# Altium PCB Function Generator.PcbDoc
Units mm, origin at the board's own origin, x right, y up, seen from the top; angles counter-clockwise.
Board outline 100 x 100 mm, 2 copper layers (Top Layer, Bottom Layer); 101 components, 64 nets, 319 pads, 0 vias.
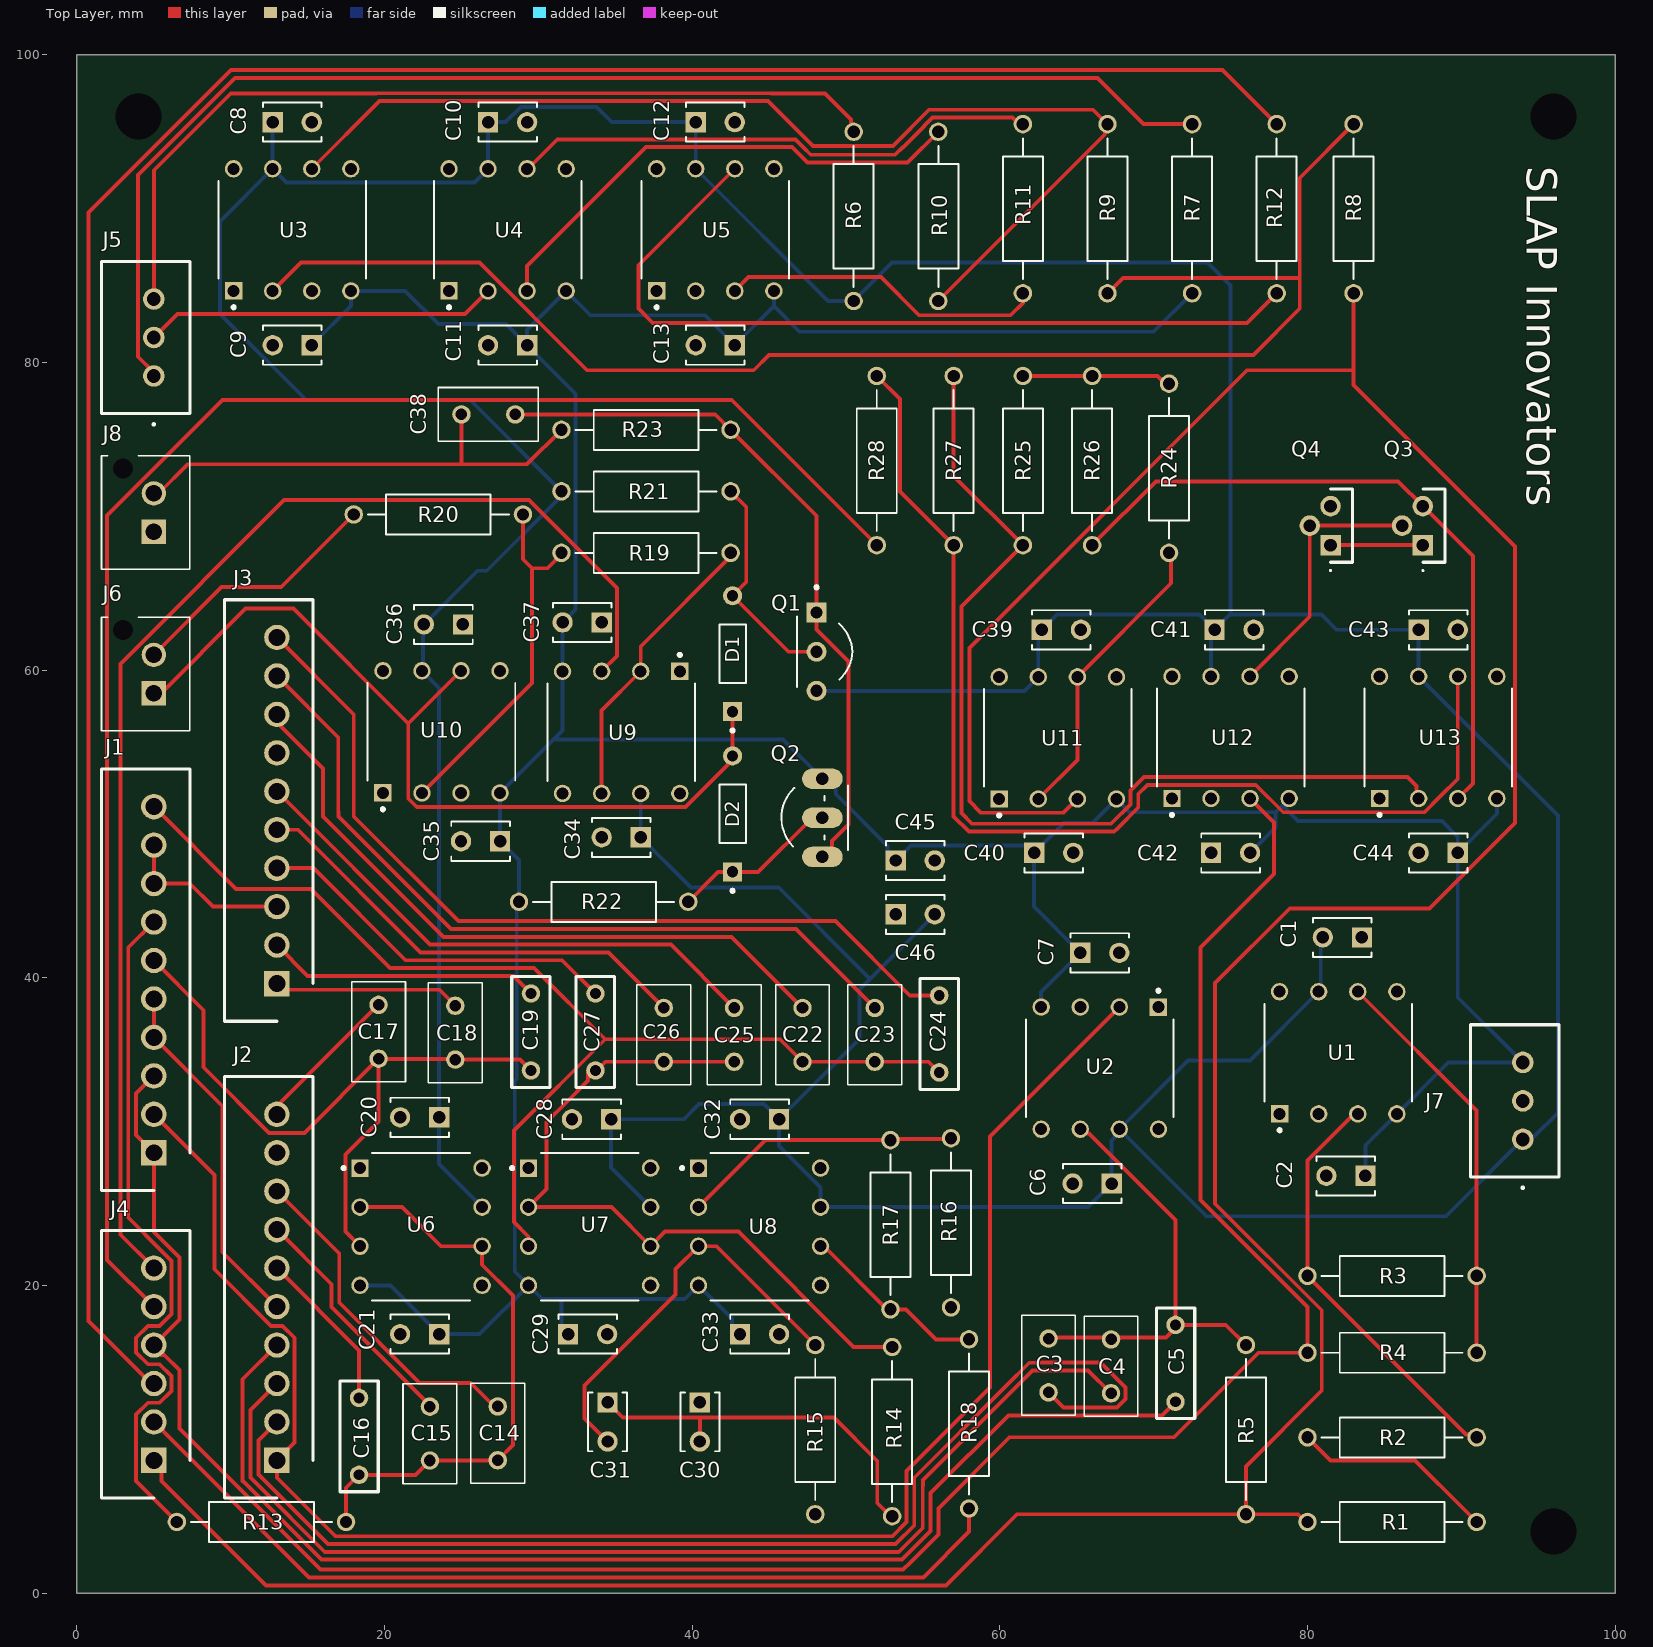
[diagram p0: Top Layer view]
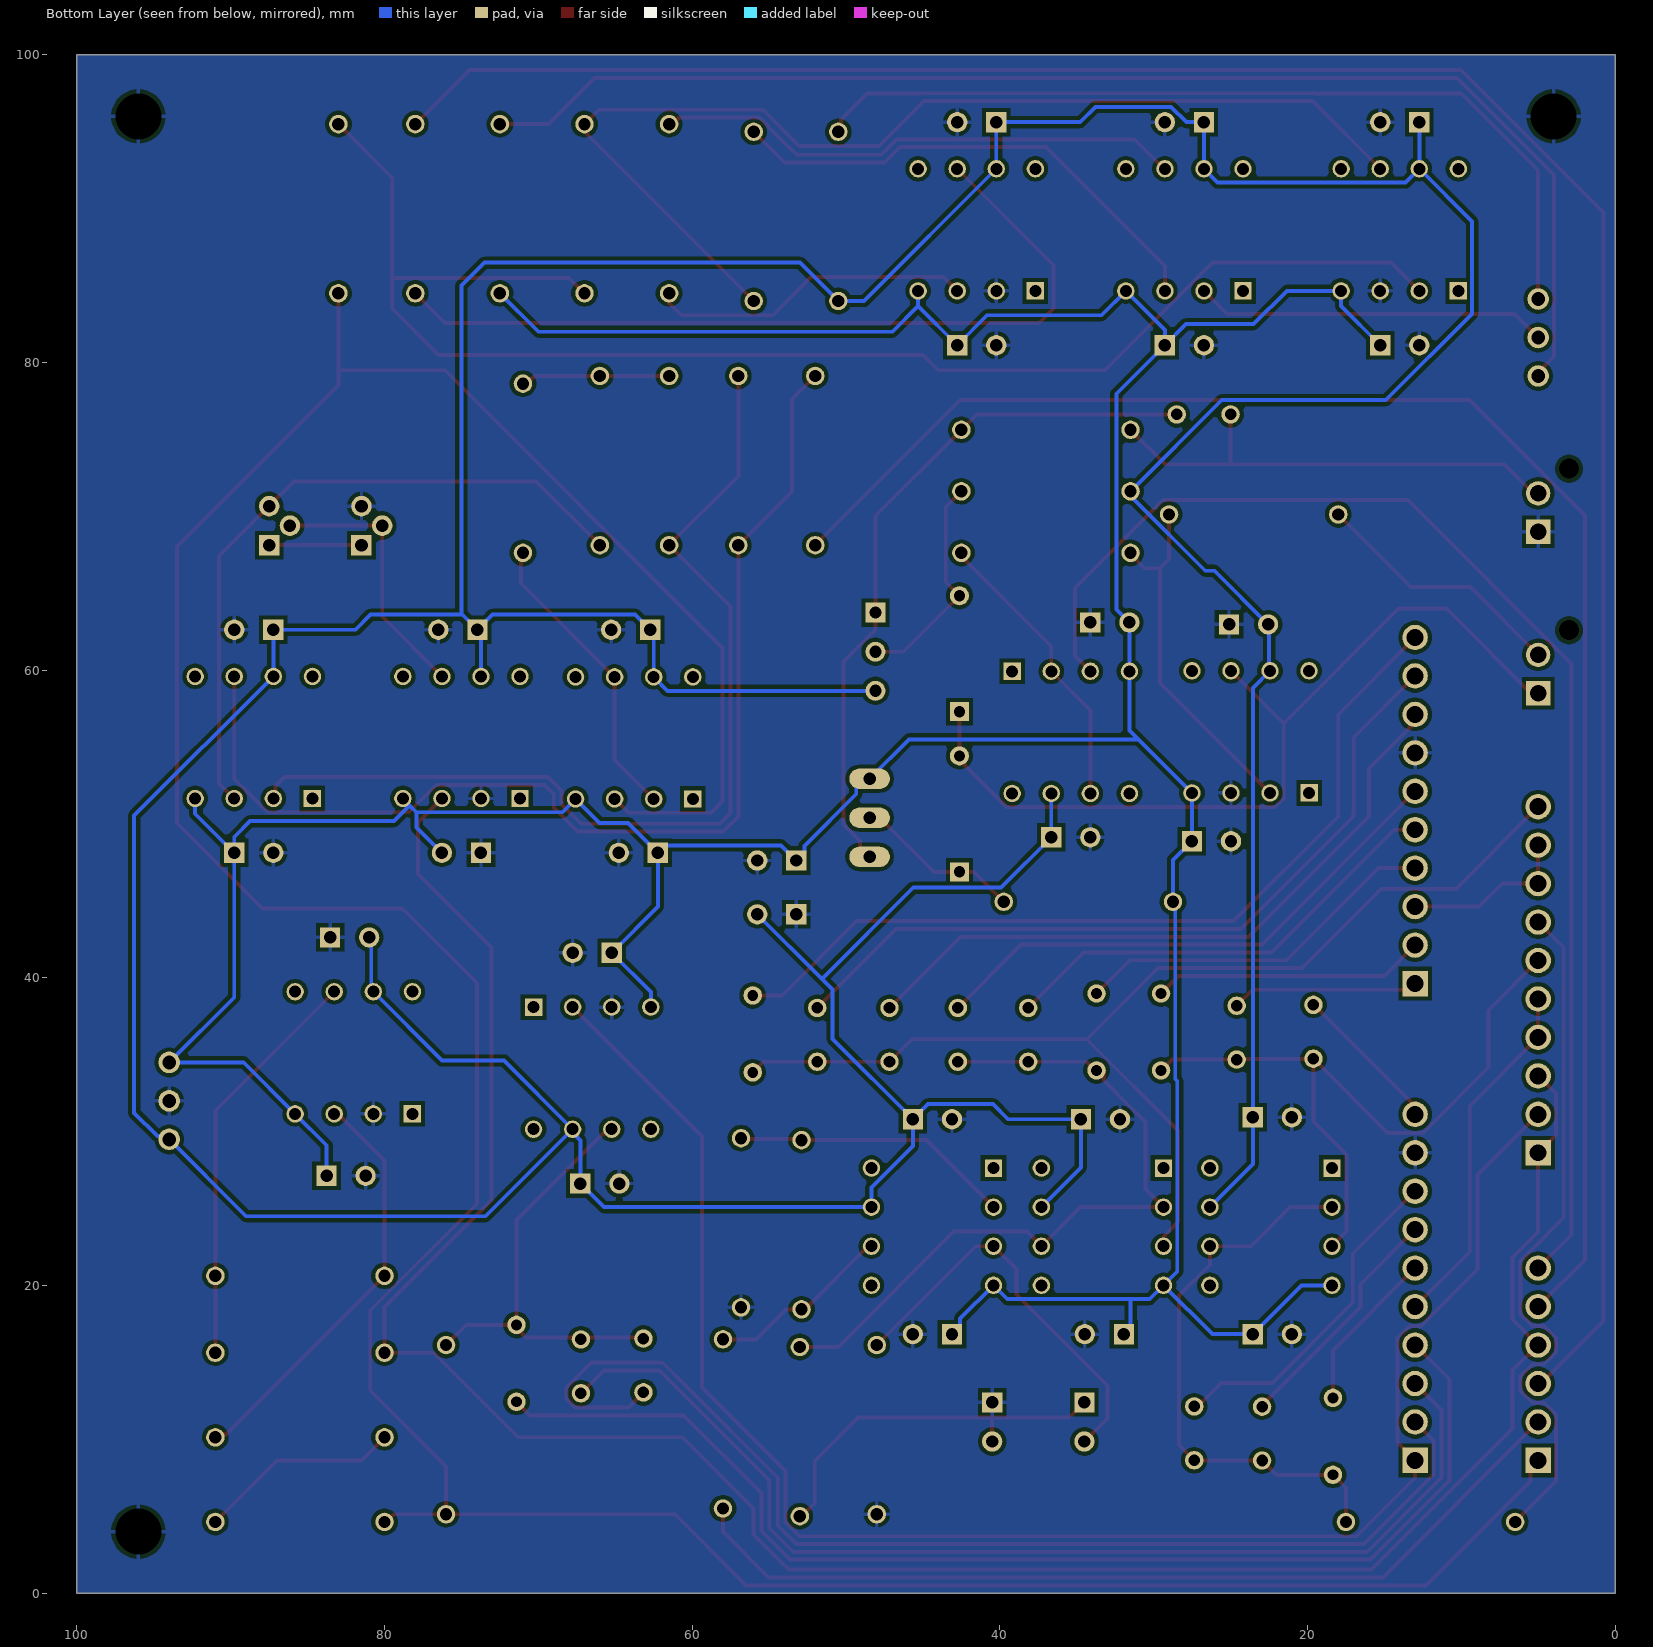
[diagram p1: Bottom Layer view, seen from below]
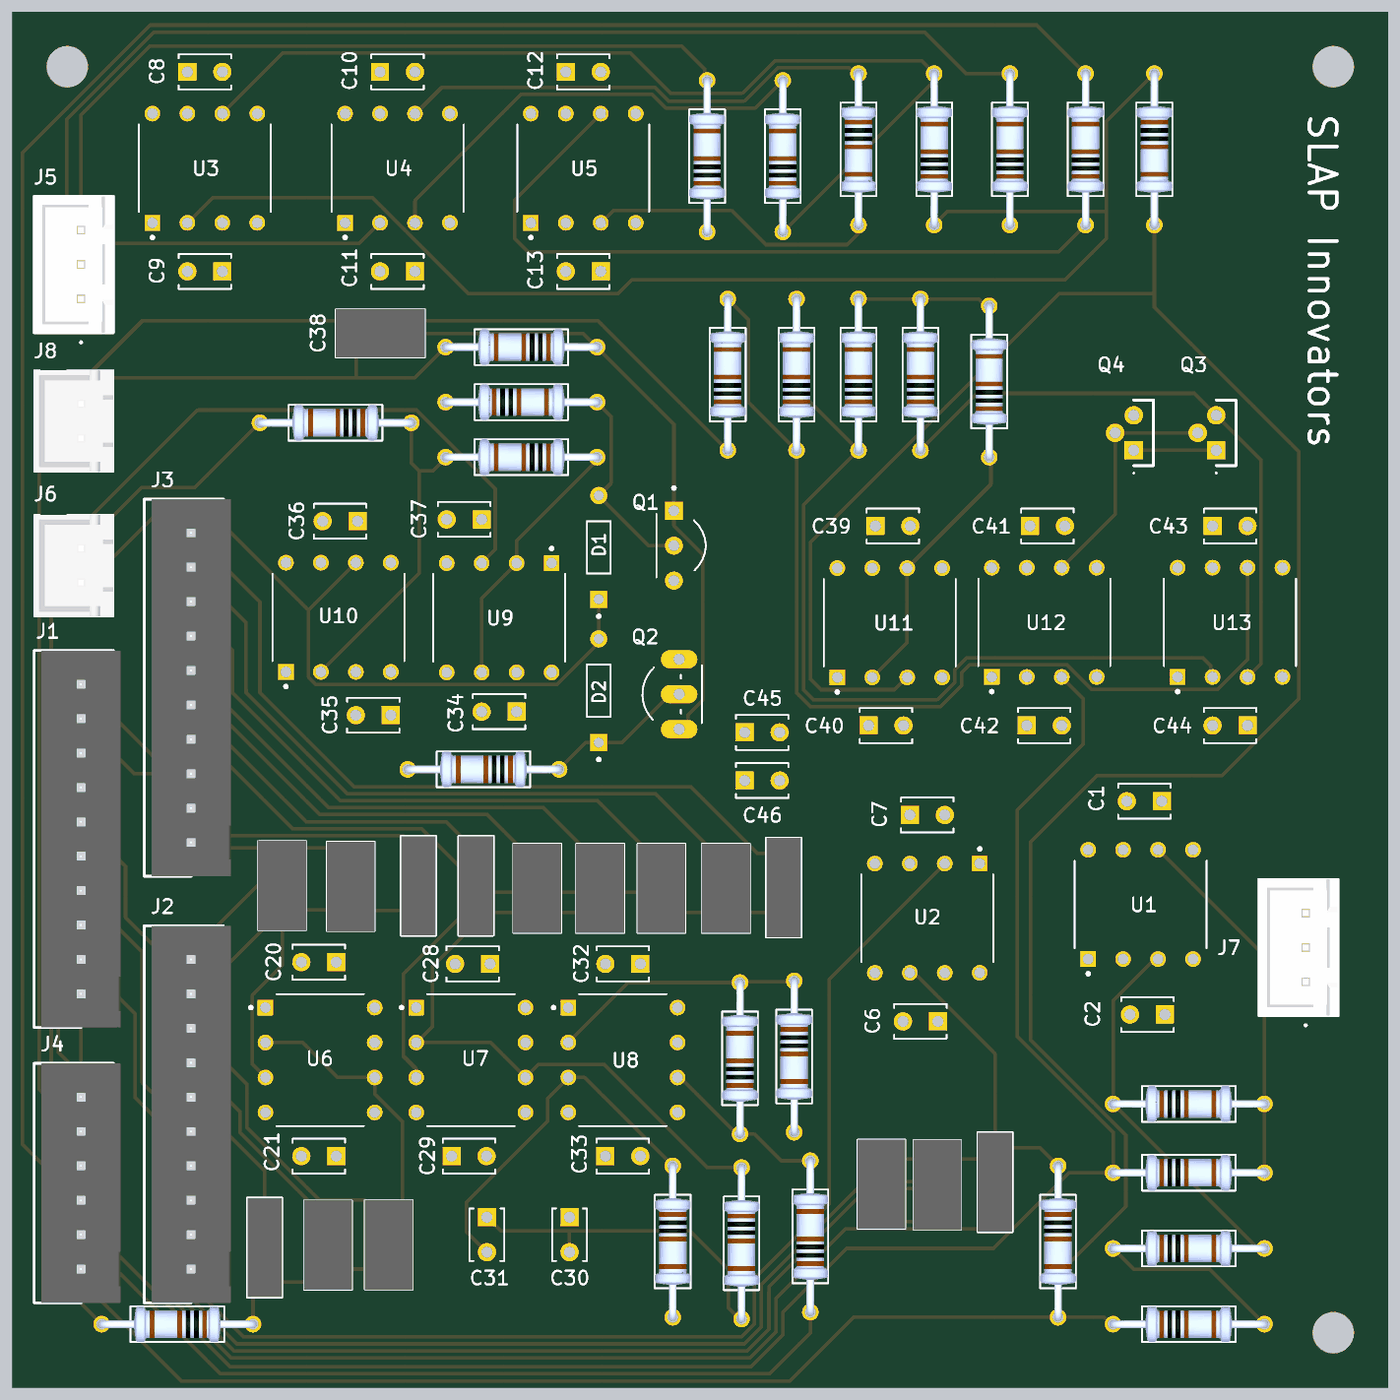
[diagram p2: 3D render of the assembled board from above, using the file's embedded part models]

## Layer stack, top to bottom
Top Solder: solder mask 0.0102, Solder Resist, Dk 3.5
Top Layer: signal copper 0.0356
Dielectric 1: dielectric 0.32, FR-4, Dk 4.8
Bottom Layer: signal copper 0.0356
Bottom Solder: solder mask 0.0102, Solder Resist, Dk 3.5

## Board outline
0,0 100,0 100,100 0,100

## Design rules (kind name [scope] priority, off if disabled: settings)
Clearance [All] p1: gap=0.254 ignorepadtopadclearanceinfootprint=FALSE except(0.2: Arc-THPad Track-THPad SMDPad-THPad THPad-THPad)
HoleSize [All] p1: absolutevalues=TRUE maxlimit=5 minlimit=0.025 maxpercent=80.000 minpercent=20.000
MinimumSolderMaskSliver [All] p1: minsoldermaskwidth=0.2
PolygonConnect [All] p1: connectstyle=Relief reliefconductorwidth=0.254 reliefentries=4 polygonreliefangle="90 Angle" airgapwidth=0.254
RoutingVias [All] p1: holewidth=0.711 width=1.27 viastyle="Through Hole" minholewidth=0.711 minwidth=1.27 maxholewidth=0.711 maxwidth=1.27
SolderMaskExpansion [All] p1: expansion=0 istentingtop=FALSE
SupplyNets "Schematic Supply Nets" [InNet('GND')] p1: voltage=0.000
Width [All] p1: maxlimit=0.254 minlimit=0.254 preferedwidth=0.254
28 further rules are at their usual default settings.

## Components (designator, comment, footprint, x,y, rotation, side; value= is the part's Value field where it differs from the comment)
C1 "0.1uF" CAPRR254W54L381T254H466 82.27,42.626 r180 top
C2 "0.1uF" CAPRR254W54L381T254H466 82.5,27.126 r180 top
C3 "10nF" 50F2D103J 63.167,13.049 r90 top
C4 "100nF" 50F2D103J 67.231,12.993 r90 top
C5 "FKS2_1.0N_100M" FKS210N100M 71.422,12.438 r90 top
C6 "0.1uF" CAPRR254W54L381T254H466 66,26.626 r180 top
C7 "0.1uF" CAPRR254W54L381T254H466 66.5,41.626 r0 top
C8 "0.1uF" CAPRR254W54L381T254H466 14,95.626 r0 top
C9 "0.1uF" CAPRR254W54L381T254H466 14,81.126 r180 top
C10 "0.1uF" CAPRR254W54L381T254H466 28,95.626 r0 top
C11 "0.1uF" CAPRR254W54L381T254H466 28,81.126 r180 top
C12 "0.1uF" CAPRR254W54L381T254H466 41.5,95.626 r0 top
C13 "0.1uF" CAPRR254W54L381T254H466 41.5,81.126 r180 top
C14 "2.2nF" 50F2D103J 27.361,8.636 r90 top
C15 "22nF" 50F2D103J 22.951,8.622 r90 top
C16 "220nF" FKS210N100M 18.344,7.691 r90 top
C17 "2.2nF" 50F2D103J 19.614,38.242 r270 top
C18 "22nF" 50F2D103J 24.602,38.186 r270 top
C19 "220nF" FKS210N100M 29.52,38.98 r270 top
C20 "0.1uF" CAPRR254W54L381T254H466 22.281,30.932 r180 top
C21 "0.1uF" CAPRR254W54L381T254H466 22.281,16.835 r180 top
C22 "2.2nF" 50F2D103J 47.173,38.044 r270 top
C23 "22nF" 50F2D103J 51.872,38.044 r270 top
C24 "220nF" FKS210N100M 56.063,38.853 r270 top
C25 "2.2nF" 50F2D103J 42.728,34.544 r90 top
C26 "22nF" 50F2D103J 38.156,34.544 r90 top
C27 "220nF" FKS210N100M 33.711,33.98 r90 top
C28 "0.1uF" CAPRR254W54L381T254H466 33.457,30.805 r180 top
C29 "0.1uF" CAPRR254W54L381T254H466 33.203,16.835 r0 top
C30 "0.1uF" CAPRR254W54L381T254H466 40.5,11.126 r270 top
C31 "0.1uF" CAPRR254W54L381T254H466 34.5,11.126 r270 top
C32 "0.1uF" CAPRR254W54L381T254H466 44.379,30.805 r180 top
C33 "0.1uF" CAPRR254W54L381T254H466 44.379,16.835 r0 top
C34 "0.1uF" CAPRR254W54L381T254H466 35.386,49.133 r180 top
C35 "0.1uF" CAPRR254W54L381T254H466 26.242,48.879 r180 top
C36 "0.1uF" CAPRR254W54L381T254H466 23.829,62.976 r180 top
C37 "0.1uF" CAPRR254W54L381T254H466 32.846,63.103 r180 top
C38 "0.1nF" 50F2D103J 28.5,76.626 r180 top
C39 "0.1uF" CAPRR254W54L381T254H466 64,62.626 r0 top
C40 "0.1uF" CAPRR254W54L381T254H466 63.5,48.126 r0 top
C41 "0.1uF" CAPRR254W54L381T254H466 75.23,62.626 r0 top
C42 "0.1uF" CAPRR254W54L381T254H466 75,48.126 r0 top
C43 "0.1uF" CAPRR254W54L381T254H466 88.5,62.626 r0 top
C44 "0.1uF" CAPRR254W54L381T254H466 88.5,48.126 r180 top
C45 "0.1uF" CAPRR254W54L381T254H466 54.5,47.626 r0 top
C46 "0.1uF" CAPRR254W54L381T254H466 54.5,44.126 r0 top
D1 "1N4148" DIOAD753W49L380D172B 42.625,61.071 r90 top
D2 "1N4148" DIOAD753W49L380D172B 42.625,50.657 r90 top
J1 "B10B-XH-A (Var R)" SHDR10W64P0X250_1X10_2740X575X700P 5,28.626 r90 top
J2 "B10B-XH-A (Cap Select 1)" SHDR10W64P0X250_1X10_2740X575X700P 13,8.626 r90 top
J3 "B10B-XH-A (Cap Select 2)" SHDR10W64P0X250_1X10_2740X575X700P 13,39.626 r90 top
J4 "B6B-XH-A (Wave Select)" SHDR6W64P0X250_1X6_1740X575X700P 5,8.626 r90 top
J5 "B3B-XH-A_LF__SN_" B3BXHALFSN 5,79.126 r90 top
J6 "B2B-XH-AM_LF__SN_" B2BXHAMLFSN 5,58.5 r90 top
J7 "Power In" B3BXHALFSN 94,29.5 r90 top
J8 "Output" B2BXHAMLFSN 5,69 r90 top
Q1 "2N2222" TO92254P470H750-3 50.416,61.198 r270 top
Q2 "2N2907" TO92-EBC-OVAL 47.197,50.403 r90 top
Q3 "2N7000" 2N7000RLRAG 87.5,68.126 r90 top
Q4 "2N7000" 2N7000RLRAG 81.5,68.126 r90 top
R1 "2K" RESAD1100W55L680D260 85.5,4.626 r0 top
R2 "2K" RESAD1100W55L680D260 85.5,10.126 r0 top
R3 "10K" RESAD1100W55L680D260 85.5,20.626 r0 top
R4 "33" RESAD1100W55L680D260 85.5,15.626 r0 top
R5 "33" RESAD1100W55L680D260 76,10.626 r270 top
R6 "TBD" RESAD1100W55L680D260 50.5,89.5 r90 top
R7 "TBD" RESAD1100W55L680D260 72.5,90 r90 top
R8 "1K" RESAD1100W55L680D260 83,90 r270 top
R9 "2.2K" RESAD1100W55L680D260 67,90 r90 top
R10 "33" RESAD1100W55L680D260 56,89.5 r90 top
R11 "33" RESAD1100W55L680D260 61.5,90 r270 top
R12 "33" RESAD1100W55L680D260 78,90 r90 top
R13 "33" RESAD1100W55L680D260 12,4.626 r180 top
R14 "50" RESAD1100W55L680D260 53,10.5 r270 top
R15 "100k" RESAD1100W55L680D260 48,10.626 r270 top
R16 "330" RESAD1100W55L680D260 56.825,24.074 r270 top
R17 "20k" RESAD1100W55L680D260 52.888,23.947 r90 top
R18 "33" RESAD1100W55L680D260 58,11 r90 top
R19 "500" RESAD1100W55L680D260 37,67.626 r180 top
R20 "33" RESAD1100W55L680D260 23.5,70.126 r180 top
R21 "1M" RESAD1100W55L680D260 37,71.626 r0 top
R22 "1M" RESAD1100W55L680D260 34.243,44.942 r180 top
R23 "33" RESAD1100W55L680D260 37,75.626 r180 top
R24 "33" RESAD1100W55L680D260 71,73.126 r90 top
R25 "2k" RESAD1100W55L680D260 61.5,73.626 r90 top
R26 "2k" RESAD1100W55L680D260 66,73.626 r90 top
R27 "2k" RESAD1100W55L680D260 57,73.626 r90 top
R28 "33" RESAD1100W55L680D260 52,73.626 r90 top
U1 "LM318N" DIP794W45P254L959H508Q8 82,35.126 r90 top
U2 "LM318N" DIP794W45P254L959H508Q8 66.5,34.126 r270 top
U3 "LM318N" DIP794W45P254L959H508Q8 14,88.626 r90 top
U4 "LM318N" DIP794W45P254L959H508Q8 28,88.626 r90 top
U5 "LM318N" DIP794W45P254L959H508Q8 41.5,88.626 r90 top
U6 "LM318N" DIP794W45P254L959H508Q8 22.375,23.82 r0 top
U7 "LM318N" DIP794W45P254L959H508Q8 33.33,23.82 r0 top
U8 "LM318N" DIP794W45P254L959H508Q8 44.379,23.82 r0 top
U9 "LM318N" DIP794W45P254L959H508Q8 35.386,55.958 r270 top
U10 "LM318N" DIP794W45P254L959H508Q8 23.702,55.991 r90 top
U11 "LM318N" DIP794W45P254L959H508Q8 63.77,55.596 r90 top
U12 "LM318N" DIP794W45P254L959H508Q8 75,55.626 r90 top
U13 "LM318N" DIP794W45P254L959H508Q8 88.5,55.626 r90 top

## Footprints (in the part's own frame and the unit in brackets; to place one, negate y for a bottom-side part, rotate by r counter-clockwise, add the part's x,y. Pads: shape width x height; smd on the part's side, far side on the other; paste and mask are expansions set on the pad)
2N7000RLRAG [mm]
  rect 1.333x1.333 hole 0.82: 1(0,0)
  round 1.333 hole 0.82: 2(1.27,1.35) 3(2.54,0)
  silkscreen extent -1.7,-1.43 3.65,0.05
50F2D103J [mm]
  round 1.2 hole 0.75: 1(0,0) 2(3.5,0)
  silkscreen extent -1.5,-1.75 5,1.75, body extent -1.5,-1.75 5,1.75, height 8.6
B2BXHAMLFSN [mm]
  rect 1.575x1.575 hole 1.05: 1(0,0)
  round 1.575 hole 1.05: 2(2.5,0)
  round 0.65 hole 1.3 unplated: MH1(4.1,2)
  silkscreen extent -2.45,-2.35 4.95,3.4, body extent -2.45,-2.36 4.95,3.39, height 6.9
B3BXHALFSN [mm]
  round 1.4 hole 0.9: 1(0,0) 2(2.5,0) 3(5,0)
  silkscreen extent -3.2,-2.35 7.45,3.4, body extent -2.45,-2.35 7.45,3.4, height 7.09
CAPRR254W54L381T254H466 [mm]
  rect 1.318x1.318 / inner round 1.318 / far side rect 1.318x1.318 hole 0.81: 1(-1.27,0)
  round 1.318 hole 0.81: 2(1.27,0)
  silkscreen extent -1.91,-1.27 1.91,1.27
DIOAD753W49L380D172B [mm]
  round 1.238 hole 0.73: A(3.768,0)
  rect 1.238x1.238 / inner round 1.238 / far side rect 1.238x1.238 hole 0.73: K(-3.768,0)
  silkscreen extent -5.1,-0.86 1.9,0.86
DIP794W45P254L959H508Q8 [mm]
  rect 1.13x1.13 hole 0.78: 1(-3.97,3.81)
  round 1.13 hole 0.78: 2(-3.97,1.27) 3(-3.97,-1.27) 4(-3.97,-3.81) 5(3.97,-3.81) 6(3.97,-1.27) 7(3.97,1.27) 8(3.97,3.81)
  silkscreen extent -5.13,-4.79 3.18,4.79
FKS210N100M [mm]
  round 1.2 hole 0.7: 1(0,0) 2(5,0)
  silkscreen extent -1.1,-1.25 6.1,1.25, body extent -1.1,-1.25 6.1,1.25, height 6.6
RESAD1100W55L680D260 [mm]
  round 1.2 hole 0.8: 1(-5.5,0) 2(5.5,0)
  silkscreen extent -4.58,-1.3 4.58,1.3, body extent -5.77,-1.3 5.77,1.3, height 2.6
SHDR6W64P0X250_1X6_1740X575X700P [mm]
  rect 1.65x1.65 hole 1.1: 1(0,0)
  round 1.65 hole 1.1: 2(2.5,0) 3(5,0) 4(7.5,0) 5(10,0) 6(12.5,0)
  silkscreen extent -2.45,-2.35 14.95,3.4, body extent -2.45,-2.88 14.95,2.88, height 7
SHDR10W64P0X250_1X10_2740X575X700P [mm]
  rect 1.65x1.65 hole 1.1: 1(0,0)
  round 1.65 hole 1.1: 2(2.5,0) 3(5,0) 4(7.5,0) 5(10,0) 6(12.5,0) 7(15,0) 8(17.5,0) 9(20,0) 10(22.5,0)
  silkscreen extent -2.45,-2.35 24.95,3.4, body extent -2.45,-2.88 24.95,2.88, height 7
TO92-EBC-OVAL [mil]
  oval 52x104 hole 32: B(0,-50) C(100,-50) E(-100,-50)
  silkscreen extent -82,-115 82,55
TO92254P470H750-3 [mm]
  rect 1.298x1.298 / inner round 1.298 / far side rect 1.298x1.298 hole 0.79: 1(-2.54,-2.33)
  round 1.298 hole 0.79: 2(0,-2.33) 3(2.54,-2.33)
  silkscreen extent -4.29,-3.6 2.3,0

## Part data
C1 C2 C6 C7 C8 C9 C10 C11 C12 C13 C20 C21 C28 C29 C30 C31 C32 C33 C34 C35 C36 C37 C39 C40 C41 C42 C43 C44 C45 C46: library part C315C104M5U5TA, Package=None, Availability=Unavailable, MF="{'manufacturer': u'KEMET'}", MP=C315C104M5U5TA, Price=None
C3 C4 C14 C15 C17 C18 C22 C23 C25 C26 C38: library part 50F2D103J, "Capacitor", Manufacturer_Name=Rubycon, Height=8.5mm, Manufacturer_Part_Number=50F2D103J
C5: "Capacitor", Manufacturer_Name=WIMA, Manufacturer_Part_Number="FKS2 1.0N 100M", Datasheet Link=https://www.wima.de/wp-content/uploads/media/e_WIMA_FKS_2.pdf, Height=6.5mm
C16 C19 C24 C27: library part FKS2_1.0N_100M, "Capacitor", Manufacturer_Name=WIMA, Manufacturer_Part_Number="FKS2 1.0N 100M", Datasheet Link=https://www.wima.de/wp-content/uploads/media/e_WIMA_FKS_2.pdf, Height=6.5mm
D1 D2: Package=None, Availability=Unavailable, MP=1N4148, Price=None
J1 J2 J3: library part B10B-XH-A, "Connector", Manufacturer_Name="JST (JAPAN SOLDERLESS TERMINALS)", Datasheet Link=http://www.jst-mfg.com/product/pdf/eng/eXH.pdf, Height=7mm, Manufacturer_Part_Number=B10B-XH-A
J4: library part B6B-XH-A_LF__SN_, "Connector", Arrow Part Number=B6B-XH-A(LF)(SN), Manufacturer_Name="JST (JAPAN SOLDERLESS TERMINALS)", Mouser Part Number=306-B6BXHALFSN, Arrow Price/Stock=https://www.arrow.com/en/products/b6b-xh-a-lf-sn/jst-manufacturing?region=europe, Datasheet Link=https://datasheet.lcsc.com/szlcsc/JST-Sales-America-B6B-XH-A-LF-SN_C144397.pdf, Height=7mm, Manufacturer_Part_Number=B6B-XH-A(LF)(SN), Mouser Price/Stock=https://www.mouser.co.uk/ProductDetail/JST-Commercial/B6B-XH-ALFSN?qs=cdbOS8ANM9AKmMmofXbwlw%3D%3D
J5: "Connector", Arrow Part Number=B3B-XH-A(LF)(SN), Manufacturer_Name="JST (JAPAN SOLDERLESS TERMINALS)", Mouser Part Number=306-B3BXHALFSNP, Arrow Price/Stock=https://www.arrow.com/en/products/b3b-xh-a-lf-sn/jst-manufacturing?region=europe, Datasheet Link=https://datasheet.lcsc.com/szlcsc/1812131720_JST-Sales-America-B3B-XH-A-LF-SN_C144394.pdf, Height=7mm, Manufacturer_Part_Number=B3B-XH-A(LF)(SN), Mouser Price/Stock=https://www.mouser.co.uk/ProductDetail/JST-Commercial/B3B-XH-ALFSN?qs=cdbOS8ANM9BVkoboCCIEMQ%3D%3D
J6: "Connector", Arrow Part Number=B2B-XH-AM(LF)(SN), Manufacturer_Name="JST (JAPAN SOLDERLESS TERMINALS)", Mouser Part Number=306-B2B-XH-AMLFSNP, Arrow Price/Stock=https://www.arrow.com/en/products/b2b-xh-am-lf-sn/jst-manufacturing?region=europe, Datasheet Link=https://www.jst-mfg.com/product/pdf/eng/eXH.pdf, Height=7mm, Manufacturer_Part_Number=B2B-XH-AM(LF)(SN), Mouser Price/Stock=https://www.mouser.co.uk/ProductDetail/JST-Commercial/B2B-XH-AMLFSN?qs=cdbOS8ANM9BJgHgwB7WxQw%3D%3D
J7: library part B3B-XH-A_LF__SN_, "Connector", Arrow Part Number=B3B-XH-A(LF)(SN), Manufacturer_Name="JST (JAPAN SOLDERLESS TERMINALS)", Mouser Part Number=306-B3BXHALFSNP, Arrow Price/Stock=https://www.arrow.com/en/products/b3b-xh-a-lf-sn/jst-manufacturing?region=europe, Datasheet Link=https://datasheet.lcsc.com/szlcsc/1812131720_JST-Sales-America-B3B-XH-A-LF-SN_C144394.pdf, Height=7mm, Manufacturer_Part_Number=B3B-XH-A(LF)(SN), Mouser Price/Stock=https://www.mouser.co.uk/ProductDetail/JST-Commercial/B3B-XH-ALFSN?qs=cdbOS8ANM9BVkoboCCIEMQ%3D%3D
J8: library part B2B-XH-AM_LF__SN_, "Connector", Arrow Part Number=B2B-XH-AM(LF)(SN), Manufacturer_Name="JST (JAPAN SOLDERLESS TERMINALS)", Mouser Part Number=306-B2B-XH-AMLFSNP, Arrow Price/Stock=https://www.arrow.com/en/products/b2b-xh-am-lf-sn/jst-manufacturing?region=europe, Datasheet Link=https://www.jst-mfg.com/product/pdf/eng/eXH.pdf, Height=7mm, Manufacturer_Part_Number=B2B-XH-AM(LF)(SN), Mouser Price/Stock=https://www.mouser.co.uk/ProductDetail/JST-Commercial/B2B-XH-AMLFSN?qs=cdbOS8ANM9BJgHgwB7WxQw%3D%3D
Q1: library part 2N2222A, "Bipolar (BJT) Transistor NPN 40 V 600 mA 250MHz 625 mW Through Hole TO-92", Package="TO-92-3 Diotec", Availability="In Stock", Check_prices=https://www.snapeda.com/parts/2N2222A/Diotec/view-part/?ref=eda, MF="Diotec Semiconductor", MP=2N2222A, Price=None, Purchase-URL=https://pricing.snapeda.com/search/part/2N2222A/?ref=eda, SnapEDA_Link=https://www.snapeda.com/parts/2N2222A/Diotec/view-part/?ref=snap
Q2: library part 2N2907*, "Bipolar _BJT_ Transistor PNP 40V 600mA 200MHz 1.8W Through Hole TO-18", Package="TO-18 STMicroelectronics", Availability=Unavailable, MF="ON Semiconductor", MP=2N2907, Price=None, SnapEDA_Link=https://www.snapeda.com/parts/2N2907/ON%20Semiconductor/view-part/13809/?ref=snap
Q3 Q4: library part 2N7000RLRAG, "MOSFET (N-Channel)", Manufacturer_Name=onsemi, Mouser Part Number=863-2N7000RLRAG, Arrow Part Number=2N7000RLRAG, Arrow Price/Stock=https://www.arrow.com/en/products/2n7000rlrag/on-semiconductor, Datasheet Link=https://www.onsemi.com/download/data-sheet/pdf/NDS7002A-D.PDF, Height=5.33mm, Manufacturer_Part_Number=2N7000RLRAG, Mouser Price/Stock=https://www.mouser.co.uk/ProductDetail/ON-Semiconductor/2N7000RLRAG/?qs=vLkC5FC1VN%252BydlHaU%252BKS%252Bw%3D%3D
R1 R2 R3 R4 R5 R6 R7 R8 R9 R10 R11 R12 R13 R14 R15 R16 R17 R18 R19 R20 R21 R22 R23 R24 R25 R26 R27 R28: library part MFR-25FBF52-1K, "1.07 kOhms Â±1% 0.25W, 1/4W Through Hole Resistor Axial - Metal Film", Package="Axial Yageo", Availability="In Stock", Check_prices=https://www.snapeda.com/parts/MFR-25FBF52-1K/Yageo/view-part/?ref=eda, MF=Yageo, MP=MFR-25FBF52-1K, Price=None, Purchase-URL=https://pricing.snapeda.com/search/part/MFR-25FBF52-1K/?ref=eda, SnapEDA_Link=https://www.snapeda.com/parts/MFR-25FBF52-1K/Yageo/view-part/?ref=snap
U1 U2 U3 U4 U5 U6 U7 U8 U9 U10 U11 U12 U13: "Single 40V, 15MHz, high slew rate operational amplifier 8-PDIP 0 to 70", Package="PDIP-8 Texas Instruments", Availability=Good, DigiKey-Purchase-URL=https://snapeda.com/shop?store=DigiKey&id=137601, MF="Texas Instruments", Mouser-Purchase-URL=https://snapeda.com/shop?store=Mouser&id=137601, MP=LM318N/NOPB, Price=None, SnapEDA_Link=https://www.snapeda.com/parts/LM318N/NOPB/Texas%20Instruments/view-part/137601/?ref=snap

## Free pads (board coordinates)
  round 0 hole 3: 2(4,96) 2(96,4) 2(96,96)

## Nets (pads, with @x,y where several pads share a name; then routed paths per layer and width w, separated by ;. In a path a pad name is that pad's centre, name@x,y a point inside that pad or via, vN(x,y) a via of type N, cw(c..) or ccw(c..) an arc to the next point about the centre after c; other vN are vias at no path point)
"Amp In": J4.6 U9.3 | length 85
  Top Layer w0.254: J4.6 2.832,23.294 2.832,60.408 13.477,71.053 29.384,71.053 35.102,65.335 35.102,60.914 U9.3
GND: C1.1 C2.2 C6.2 C7.2 C8.2 C9.2 C10.2 C11.2 C12.2 C13.2 C20.2 C21.2 C28.2 C29.2 C30.1 C32.2 C33.2 C34.2 C35.2 C36.1 C37.1 C39.2 C40.2 C41.2 C42.1 C43.2 C44.2 C45.2 C46.1 J2.9 J3.7 J7.2 J8.1 pad.2 Q4.3 R15.2 R16.2 U1.2 U2.3 U3.3 U5.2 U10.3 U12.2
J1_2: J1.2 J2.1 U2.2 | length 110.4
  Top Layer w0.254: J1.2 8.944,27.182 8.944,21.053 12.621,17.376 13.379,17.376 14.152,16.604 14.152,9.778 J2.1 13,7.5 16.801,3.699 53.01,3.699 53.927,4.616 53.927,7.927 59.367,13.367 59.367,29.694 U2.2
J1_4: J1.4 J1.5 J2.5 | length 23.3
  Top Layer w0.254: J1.5 J1.4 9.452,31.674 9.452,22.174 J2.5
J1_6: C17.2 C18.2 C19.2 J1.6 U6.3 | length 47.1
  Top Layer w0.254: J1.6 8.237,37.889 8.237,34.184 12.5,29.92 14.792,29.92 C17.2 ; U6.3 17.459,23.496 17.459,28.515 19.614,30.67 C17.2 ; C19.2 28.814,34.686 C18.2 24.574,34.714 19.642,34.714 C17.2
J1_7: J1.7 R13.2 | length 46.1
  Top Layer w0.254: J1.7 3.34,41.966 3.34,24.415 5.477,22.278 6.152,21.604 6.152,18.149 5.379,17.376 4.621,17.376 3.848,16.604 3.848,15.649 4.621,14.876 5.379,14.876 6.152,14.104 6.152,13.149 5.379,12.376 4.621,12.376 3.848,11.604 3.848,7.278 R13.2
J1_8: J1.8 J1.9 J3.3 | length 11.1
  Top Layer w0.254: J1.9 J1.8 7.34,46.126 8.84,44.626 J3.3
J1_10: C22.2 C23.2 C24.2 J1.10 U7.3 | length 74.5
  Top Layer w0.254: J1.10 10.348,45.778 15.222,45.778 20.366,40.634 29.724,40.634 34.351,36.007 ; U7.3 29.36,23.17 28.414,24.116 28.414,30.071 34.351,36.007 ; C24.2 56.058,33.853 55.367,34.544 C23.2 C22.2 45.71,36.007 34.351,36.007
J2_2: C3.1 J2.2 | length 75.9
  Top Layer w0.254: J2.2 11.794,9.92 11.794,7.72 16.323,3.191 16.906,3.191 18.094,3.191 53.221,3.191 54.435,4.406 54.435,5.594 54.435,7.498 60.391,13.454 61.911,14.974 62.344,14.974 62.362,14.992 63.972,14.992 66.543,14.992 67.29,14.245 68.158,13.377 68.158,12.609 67.615,12.066 64.15,12.066 C3.1
J2_3: C4.1 J2.3 | length 72.1
  Top Layer w0.254: J2.3 11.286,11.912 11.286,8.151 11.286,7.509 11.34,7.455 11.763,7.032 16.112,2.683 16.695,2.683 18.305,2.683 53.431,2.683 54.992,4.244 54.992,6.992 55,7 55,7.345 62.122,14.466 62.555,14.466 62.573,14.484 65.74,14.484 C4.1
J2_4: C5.1 J2.4 | length 78.2
  Top Layer w0.254: J2.4 10.778,13.904 10.778,7.94 10.778,7.299 10.832,7.245 15.902,2.175 16.485,2.175 18.515,2.175 53.642,2.175 55.5,4.034 55.5,6.5 60.558,11.558 70.542,11.558 C5.1
J2_6: C16.2 J2.6 | length 10.6
  Top Layer w0.254: J2.6 18.344,15.782 C16.2
J2_7: C15.2 J2.7 | length 15.6
  Top Layer w0.254: J2.7 16.548,20.079 16.548,18.588 22.951,12.185 C15.2
J2_8: C14.2 J2.8 | length 22
  Top Layer w0.254: J2.8 17.056,22.071 17.056,18.886 22.281,13.66 25.607,13.66 27.131,12.136 C14.2
J2_10: C17.1 J2.10 | length 9.9
  Top Layer w0.254: J2.10 13.267,31.393 13.267,31.93 19.579,38.242 C17.1
J3_1: C18.1 J3.1 | length 12.2
  Top Layer w0.254: J3.1 13.403,39.223 23.565,39.223 C18.1
J3_2: C19.1 J3.2 | length 17.8
  Top Layer w0.254: J3.2 15,40.126 28.374,40.126 C19.1
J3_4: C27.2 J3.4 | length 24.1
  Top Layer w0.254: J3.4 15.374,47.126 21.358,41.142 31.549,41.142 C27.2
J3_5: C26.2 J3.5 | length 30
  Top Layer w0.254: J3.5 14.374,49.626 22.35,41.65 34.55,41.65 C26.2
J3_6: C25.2 J3.6 | length 35.6
  Top Layer w0.254: J3.6 22.968,42.158 38.614,42.158 C25.2
J3_8: C22.1 J3.8 | length 44.2
  Top Layer w0.254: J3.8 13.267,56.859 13.267,56.335 16,53.602 16,50.5 23.834,42.666 26.936,42.666 30.095,42.666 30.565,42.666 32.18,42.666 34.971,42.666 42.551,42.666 C22.1
J3_9: C23.1 J3.9 | length 50.8
  Top Layer w0.254: J3.9 16.992,55.634 16.992,50.79 17,50.782 17,50.5 24.326,43.174 39.035,43.174 46.742,43.174 C23.1
J3_10: C24.1 J3.10 | length 56.6
  Top Layer w0.254: J3.10 18,57.126 18,50.5 24.818,43.682 39.245,43.682 42.972,43.682 49.318,43.682 54.147,38.853 C24.1
NetC3_2: C3.2 C4.2 C5.2 R5.1 U2.6 | length 29.4
  Top Layer w0.254: C3.2 63.238,16.62 67.104,16.62 C4.2 67.358,16.62 70.811,16.62 71.422,17.231 C5.2 ; U2.6 65.467,30.156 65.737,29.887 65.79,29.887 67.303,28.374 71.422,24.255 C5.2 ; R5.1 74.688,17.438 C5.2
NetC14_1: C14.1 C15.1 C16.1 R13.1 U6.2 U6.6 | length 37
  Top Layer w0.254: R13.1@17.48,4.646 R13.1 17.5,6.847 C16.1 22.021,7.691 C15.1 22.958,8.629 27.354,8.629 C14.1 28.342,9.617 28.342,19.351 26.345,21.348 U6.6 23.678,22.55 21.138,25.09 U6.2
NetC25_1: C25.1 C26.1 C27.1 R14.1 U7.2 U7.6 | length 48.3
  Top Layer w0.254: C25.1 C26.1 34.377,34.544 33.813,33.98 C27.1 33.589,33.858 33.238,33.858 33.238,33.327 31.756,31.845 30.536,30.625 30.536,26.266 U7.2 34.76,25.09 U7.6 38.246,23.496 43.004,23.496 50.5,16 R14.1
NetC30_2: C30.2 C31.1 R14.2 | length 24.7
  Top Layer w0.254: C31.1 35.486,11.41 40.5,11.41 ; C30.2 40.5,11.41 ; R14.2 52.892,5 52.031,5.861 52.031,8.596 49.216,11.41 40.5,11.41
NetC31_2: C31.2 R15.1 U8.3 | length 26.6
  Top Layer w0.254: C31.2 33,11.356 33,13.5 38.918,19.418 38.918,21.059 U8.3 41.576,22.55 R15.1
NetC38_1: C38.1 Q1.1 Q2.E R23.1 | length 46.1
  Top Layer w0.254: C38.1 41.5,76.626 R23.1 48.086,70.04 Q1.1 48.086,62.655 50.169,60.572 50.169,49.972 49.102,48.905 49.102,48.356 48.609,47.863 Q2.E
NetD1_A: D1.A Q1.2 R21.2 | length 14.5
  Top Layer w0.254: R21.2 43.518,70.608 43.518,65.733 D1.A 46.266,61.198 Q1.2
NetD1_K: D1.K D2.A J6.1 U10.6 | length 57.6
  Top Layer w0.254: J6.1 5.237,58.263 10.974,64 14.069,64 21.54,56.529 ; U10.6 21.54,56.529 ; D1.K 42.625,54.16 42.307,53.841 42.307,53.838 39.565,51.096 22.096,51.096 21.54,51.652 21.54,56.529
NetD2_K: D2.K Q2.B R22.1 | length 11
  Top Layer w0.254: R22.1 41.524,46.723 41.69,46.889 44.292,46.889 47.807,50.403 Q2.B
NetJ5_1: J5.1 R7.2 | length 85.9
  Top Layer w0.254: J5.1 5,79.348 3.973,80.375 3.973,92.191 10.282,98.5 66.341,98.5 69.341,95.5 R7.2
NetJ5_2: J5.2 U4.2 | length 23
  Top Layer w0.254: J5.2 6.541,83.167 25.241,83.167 U4.2
NetJ5_3: J5.3 R6.2 | length 57.4
  Top Layer w0.254: J5.3 5,92.5 10,97.5 19.455,97.5 19.463,97.508 45.147,97.508 45.155,97.5 48.626,97.5 50.319,95.807 50.319,95.181 R6.2
NetJ6_2: J6.2 R20.2 | length 16.8
  Top Layer w0.254: J6.2 9.413,65.413 13.287,65.413 R20.2
NetQ3_1: Q3.1 Q4.1 | length 6
  Top Layer w0.254: Q4.1 Q3.1
NetQ3_2: Q3.2 Q4.2 U12.6 | length 17.4
  Top Layer w0.254: U12.6 80.15,63.476 Q4.2 Q3.2
NetQ3_3: Q3.3 R26.1 U13.3 | length 44.6
  Top Layer w0.254: R26.1 70.142,72.268 85.898,72.268 Q3.3 90.756,67.41 90.756,52.642 U13.3
NetR1_2: R1.2 R2.1 | length 13.3
  Top Layer w0.254: R2.1 81.5,8.626 87,8.626 90.194,5.432 R1.2
NetR2_2: R2.2 R3.1 U1.3 | length 27.4
  Top Layer w0.254: U1.3 83.033,31.156 80,28.123 R3.1 90.319,10.307 90.819,10.307 R2.2
NetR3_2: R3.2 R4.2 U1.6 | length 26.7
  Top Layer w0.254: U1.6 91,31.366 R3.2 R4.2
NetR8_1: R8.1 R9.1 U3.2 | length 98.5
  Top Layer w0.254: U3.2 14.574,86.5 26.165,86.5 33.165,79.5 44,79.5 45,80.5 76.5,80.5 79.5,83.5 79.5,85.5 ; R9.1 68,85.5 79.5,85.5 ; R8.1 79.5,92 79.5,85.5
NetR9_2: R9.2 R10.1 U3.6 | length 72.2
  Top Layer w0.254: U3.6 19.674,97 44.937,97 47.864,94.073 53.044,94.073 55.406,96.435 66.065,96.435 R9.2 66.819,95.319 66.819,94.819 R10.1
NetR10_2: R10.2 U4.3 | length 32.8
  Top Layer w0.254: U4.3 29.27,86.27 37,94 46.5,94 47.5,93 54,93 R10.2
NetR11_1: R11.1 U4.6 | length 34.6
  Top Layer w0.254: U4.6 29.654,92.98 29.699,92.98 31.226,94.508 42.702,94.508 43.774,94.508 46.71,94.508 47.226,93.992 47.71,93.508 53.197,93.508 53.681,93.992 53.71,93.992 55.073,95.355 55.073,95.384 55.616,95.927 56.384,95.927 56.392,95.919 60.825,95.919 61.244,95.5 R11.1
NetR11_2: R11.2 U5.3 | length 21.1
  Top Layer w0.254: U5.3 43.662,85.548 52.267,85.548 54.742,83.073 60.691,83.073 61.5,83.882 R11.2
NetR12_1: R12.1 U5.6 | length 54.4
  Top Layer w0.254: U5.6 36.5,86.326 36.5,83.5 37.435,82.565 55.406,82.565 76.065,82.565 R12.1
NetR16_1: R16.1 R17.2 U8.2 | length 18.3
  Top Layer w0.254: U8.2 44.766,29.447 R17.2 52.951,29.511 56.761,29.511 R16.1
NetR17_1: R17.1 R18.2 U8.6 | length 12.2
  Top Layer w0.254: U8.6 48.567,22.55 52.67,18.447 53.904,18.447 55.851,16.5 R18.2
NetR19_1: R19.1 U9.2 U9.6 | length 19.1
  Top Layer w0.254: U9.6 34.116,57.388 U9.2 36.656,61.54 42.5,67.384 R19.1
NetR19_2: R19.2 R20.1 U10.2 | length 23.7
  Top Layer w0.254: U10.2 29.583,59.172 29.583,66.626 ; R20.1 29,67.209 29.583,66.626 ; R19.2 31.5,67.544 30.583,66.626 29.583,66.626
NetR24_1: R24.1 U11.2 U11.6 | length 19.6
  Top Layer w0.254: U11.2 65.04,54.166 U11.6 71.124,65.65 71.124,67.502 R24.1
NetR24_2: R24.2 R25.2 R26.2 | length 9.7
  Top Layer w0.254: R25.2 70.244,79.126 70.744,78.626 R24.2
NetR25_1: R25.1 R27.2 U13.2 | length 64.7
  Top Layer w0.254: R27.2 57,72.626 R25.1 57.508,64.134 57.508,50.71 58.203,50.016 67.231,50.016 68.492,51.277 68.492,52.169 69.379,53.056 70.097,53.056 86.5,53.056 87.083,52.473 87.083,51.803 U13.2
NetR27_1: R27.1 R28.2 U13.6 | length 74
  Top Layer w0.254: R28.2 53.5,77.626 53.5,71.626 R27.1 57,50.5 57.992,49.508 67.441,49.508 67.652,49.718 69,51.066 69,51.959 69.589,52.548 76.639,52.548 78.423,50.764 87.599,50.764 88.643,51.808 89.77,52.935 U13.6
Out: C38.2 J8.2 R23.2 | length 31.4
  Top Layer w0.254: J8.2 5.32,71.5 7.211,73.39 25,73.39 ; C38.2 25,73.39 ; R23.2 29.264,73.39 25,73.39
PWM: J4.3 R12.2 | length 160.5
  Top Layer w0.254: J4.3 4.815,13.626 0.751,17.69 0.751,89.751 10.027,99.027 65.065,99.027 74.473,99.027 R12.2
"Saw Tooth": J4.5 R28.1 | length 109.7
  Top Layer w0.254: J4.5 1.969,21.657 1.969,70.045 9.477,77.553 42.573,77.553 R28.1
Sine: J4.2 R18.1 | length 59.9
  Top Layer w0.254: J4.2 15.101,1.025 55.025,1.025 58,4 R18.1
Square: J1.1 J1.3 J4.4 R4.1 U12.3 | length 151.6
  Top Layer w0.254: J1.3 3.848,32.474 3.848,29.778 J1.1 5,23.474 6.66,21.814 6.66,17.786 J4.4 5,15.974 5.492,15.482 5.681,15.482 6.66,14.504 6.66,10.699 15.826,1.533 53.718,1.533 54.185,2 56.008,3.823 56.008,5.508 60.632,10.132 71.317,10.132 76.811,15.626 R4.1 80,18.597 73.039,25.558 73.039,41.961 77.837,46.759 77.837,50.09 U12.3
Triangle: J4.1 R1.1 R5.2 R8.2 U11.3 | length 233.1
  Top Layer w0.254: J4.1 5.488,8.138 5.488,7.293 12.282,0.5 56.5,0.5 61.126,5.126 R5.2 ; U11.3 64.148,50.734 58.766,50.734 58.748,50.752 58.016,51.484 58.016,61.453 76.063,79.5 83,79.5 ; R1.1 79.878,4.626 79.378,5.126 R5.2 ; R8.2 83,79.5 ; R5.2 76,8.233 80.927,13.16 80.927,18.388 74,25.315 74,39.652 78.848,44.5 87.924,44.5 93.5,50.076 93.5,68.031 83,78.531 83,79.5
Vdd: C1.2 C6.1 C8.1 C10.1 C12.1 C20.1 C28.1 C32.1 C34.1 C36.2 C39.1 C41.1 C43.1 C46.2 J7.1 Q1.3 R6.1 R21.1 U1.7 U2.7 U3.7 U4.7 U5.7 U6.7 U7.7 U8.7 U9.7 U10.7 U11.7 U12.7 U13.7 | length 413.8
  Top Layer w0.254: U10.7 U10.7@22.495,60.025 ; C36.2@22.495,62.913 C36.2
  Bottom Layer w0.254: C8.1 U3.7 ; U6.7 23.551,27.884 C20.1 23.551,58.842 U10.7 22.495,60.025 22.495,62.913 C36.2 26.044,66.461 26.646,66.461 31.319,71.134 31.319,71.445 R21.1 25.573,77.553 14.909,77.553 9.298,83.164 9.298,89.164 U3.7 ; U9.7 C34.1 39.92,45.869 45.631,45.869 51.572,39.928 ; U7.7 34.727,27.663 C28.1 39.468,30.805 40.454,31.791 44.663,31.791 C32.1 ; Q1.3 61.592,58.658 U11.7 62.5,62.396 C39.1 63.716,63.612 72.974,63.612 C41.1 ; C46.2 51.572,39.928 ; U12.7 73.73,62.396 C41.1 ; 75,63.666 75,85 73.5,86.5 53,86.5 R6.1 48.826,84 U5.7 C12.1 34.773,95.626 33.787,96.612 28.862,96.612 27.876,95.626 C10.1 U4.7 25.838,91.704 13.622,91.704 U3.7 ; C1.2 80.865,42.491 80.865,39.231 U1.7 76.26,34.626 72.24,34.626 U2.7 ; C32.1 50.874,36.03 50.874,39.23 51.572,39.928 ; C32.1 45.649,29.069 48.349,26.369 U8.7 65.734,25.09 C6.1 67.27,29.419 67.77,29.919 U2.7 ; U2.7 73.426,24.5 89,24.5 94.219,29.719 94.769,29.719 96.275,31.225 96.275,50.552 U13.7 C43.1 81.888,62.626 80.902,63.612 74.946,63.612 C41.1
Vss: C2.1 C7.1 C9.1 C11.1 C13.1 C21.1 C29.1 C33.1 C35.1 C37.2 C40.1 C42.2 C44.1 C45.1 J7.3 Q2.C R7.1 R22.2 U1.4 U2.4 U3.4 U4.4 U5.4 U6.4 U7.4 U8.4 U9.4 U10.4 U11.4 U12.4 U13.4 | length 282.7
  Bottom Layer w0.254: C9.1 17.81,83.666 U3.4 21.344,84.656 23.5,82.5 27.896,82.5 C11.1 ; U6.4 20.376,20.01 C21.1 26.185,16.835 U7.4 ; C29.1 31.5,17.268 31.5,19.118 ; C33.1 42.577,17.367 42.577,17.842 U8.4 39.517,19.118 31.5,19.118 ; U5.4 45.31,83.666 ; U2.4 62.69,39.086 C7.1 62.23,44.626 C40.1 ; R7.1 70,82 46.976,82 45.31,83.666 ; C42.2 77.918,49.774 77.918,50.764 ; C2.1 83.77,29.116 U1.4 89.154,34.5 J7.3 89.77,38.73 C44.1 ; U13.4 92.31,50.666 C44.1 ; C11.1 32.427,77.969 32.427,63.954 C37.2 U9.4 31.576,56.085 30.991,55.5 ; C11.1 29.27,82.116 U4.4 33.393,83.074 40.823,83.074 C13.1 45.31,83.666 ; U7.4 30.252,19.118 31.5,19.118 ; U7.4 28.468,20.902 28.468,33.296 28.593,33.421 28.593,44.792 R22.2 28.743,47.648 C35.1 U10.4 30.991,55.5 ; 30.991,55.5 45.91,55.5 Q2.C 48.839,52.943 49.332,52.451 49.332,51.943 52.698,48.576 52.698,48.158 C45.1 54.216,48.612 61.744,48.612 C40.1 ; C40.1 64.162,50.059 66.012,50.059 U11.4 68.442,50.764 77.918,50.764 ; 77.918,50.764 78.364,51.21 79.386,50.188 88.748,50.188 89.77,49.166 C44.1
pads on no net: J6.MH1 J8.MH1 U1.1 U1.5 U1.8 U2.1 U2.5 U2.8 U3.1 U3.5 U3.8 U4.1 U4.5 U4.8 U5.1 U5.5 U5.8 U6.1 U6.5 U6.8 U7.1 U7.5 U7.8 U8.1 U8.5 U8.8 U9.1 U9.5 U9.8 U10.1 U10.5 U10.8 U11.1 U11.5 U11.8 U12.1 U12.5 U12.8 U13.1 U13.5 U13.8

## Polygon pours and split planes (outlines as drawn)
GND on Bottom Layer "GND_L02_P000" (solid, pour order 0): 0,100 100,100 100,0 0,0

## Silkscreen, mask and mechanical layers (free items; w line width, h text height)
Top Overlay:
  text "SLAP Innovators" at 94.254,92.746 h2 r270
Mechanical 1:
  the board outline again, w0.254